# Altium PCB VoiceTouch_PCB_L6.PcbDoc (part 2 of 2)
Units mm, origin at the board's own origin, x right, y up, seen from the top; angles counter-clockwise.
Board outline 39 x 33.1 mm, 6 copper layers (L1, L2 (GND), L3, L4 (PWR), L5 (GND), L6), stack 0.726 mm thick; 65 components, 88 nets, 317 pads, 56 vias.
Unrouted connection lines stored in the file: 149.
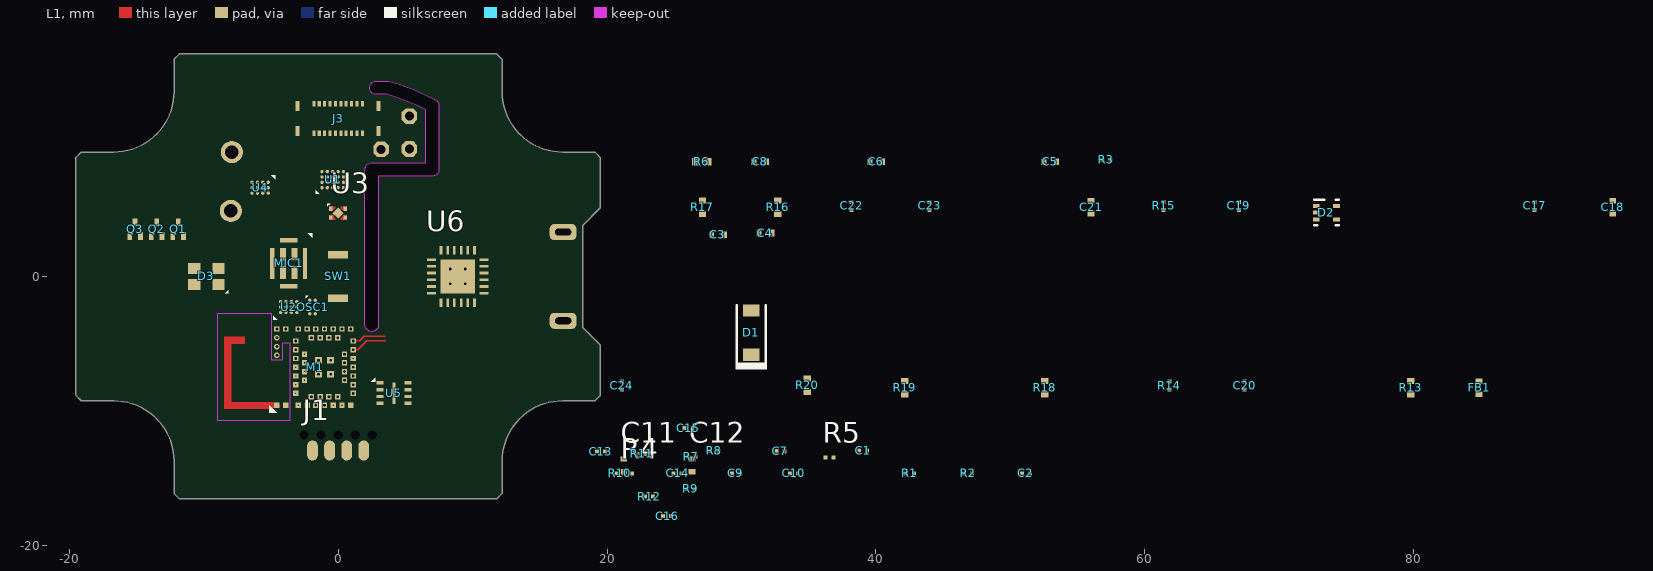
[diagram p0: L1 view]

## Part data (continued)
R6: library part NCP15XH103J03RC, "THERMISTOR NTC 10KOHM 3380K 0402", Case Code (Imperial)=0402, Case Code (Metric)=1005, Current Rating=310uA, Manufacturer=Murata, Max Operating Temperature=125°C, Max Power Dissipation=100mW, Min Operating Temperature=-40°C, Package Quantity=1, Resistance=10kR, Supplier Part Number 1=490-2414-1-ND, Tolerance=5%, Accuracy=0.7%, Case/Package=0402, Category=Thermistors, Category 1="Sensors, Transducers", Category 2="Temperature Sensors - NTC Thermistors", ComponentLink1Description=https://datasheet.ciiva.com/22712/1825737-22712084.pdf?src-supplier=Element14, ComponentLink1URL=https://datasheet.ciiva.com/22712/1825737-22712084.pdf?src-supplier=Element14, ComponentLink2Description=https://datasheet.ciiva.com/11822/0900766b807f1e39-11822074.pdf?src-supplier=RSComponents, ComponentLink2URL=https://datasheet.ciiva.com/11822/0900766b807f1e39-11822074.pdf?src-supplier=RSComponents, ComponentLink3Description=https://datasheet.ciiva.com/29387/506183-da-01-en-thermistor-murata-ncp15xh103j03rc-29387260.pdf?src-supplier=Conrad, ComponentLink3URL=https://datasheet.ciiva.com/29387/506183-da-01-en-thermistor-murata-ncp15xh103j03rc-29387260.pdf?src-supplier=Conrad, ComponentLink4Description=https://datasheet.ciiva.com/2848/r44e-2848211.pdf?src-supplier=Digi-Key, ComponentLink4URL=https://datasheet.ciiva.com/2848/r44e-2848211.pdf?src-supplier=Digi-Key, ComponentLink5Description=https://datasheet.ciiva.com/2848/r44e-2848212.pdf?src-supplier=Digi-Key, ComponentLink5URL=https://datasheet.ciiva.com/2848/r44e-2848212.pdf?src-supplier=Digi-Key, ComponentLink6Description=https://datasheet.ciiva.com/2848/r44e-2848213.pdf?src-supplier=Digi-Key, ComponentLink6URL=https://datasheet.ciiva.com/2848/r44e-2848213.pdf?src-supplier=Digi-Key, ComponentLink7Description=https://datasheet.ciiva.com/3282/l0770e-3282046.pdf?src-supplier=Avnet, ComponentLink7URL=https://datasheet.ciiva.com/3282/l0770e-3282046.pdf?src-supplier=Avnet, Depth=0.5mm, Height=0.5mm, Lead Free="Lead Free", Length=1mm, Manufacturer 1=Murata, Manufacturer Part Number=NCP15XH103J03RC, Manufacturer Part Number 1=NCP15XH103J03RC, Mount="Surface Mount", Number of Pins=2, Packaging="Tape and Reel", Power Rating=100mW, Pricing 1="1=0.12000, 5=0.11600, 10=0.10300, 25=0.09520, 50=0.07600, 100=0.06520, 500=0.05706, 1000=0.04891, 5000=0.04347 (USD)", Radiation Hardening=No, REACH SVHC="No SVHC", RoHS=Yes, Stock 1=295142, Supplier 1=Digi-Key, Termination=SMD/SMT, Width=0.5mm
R13 R16 R17: library part RC0402JR-070RL, "RES SMD 0 OHM JUMPER 1/16W 0402", Case Code (Imperial)=0402, Case Code (Metric)=1005, Manufacturer=Yageo, Max Operating Temperature=155°C, Max Power Dissipation=63mW, Min Operating Temperature=-55°C, Package Quantity=1, Power Rating=62.5mW, Resistance=0mR, Supplier Part Number 1=311-0.0JRCT-ND, Temperature Coefficient=200ppm/°C, Tolerance=5%, Voltage Rating=50V, Case/Package=0402, Category 1=Resistors, Category 2="Chip Resistor - Surface Mount", ComponentLink1Description=https://datasheet.ciiva.com/2452/pyu-rc0402-51-rohs-l-6-2452608.pdf?src-supplier=Digi-Key, ComponentLink1URL=https://datasheet.ciiva.com/2452/pyu-rc0402-51-rohs-l-6-2452608.pdf?src-supplier=Digi-Key, ComponentLink2Description=https://datasheet.ciiva.com/11808/0900766b80c66297-11808195.pdf?src-supplier=RSComponents, ComponentLink2URL=https://datasheet.ciiva.com/11808/0900766b80c66297-11808195.pdf?src-supplier=RSComponents, ComponentLink3Description=https://datasheet.ciiva.com/2452/pyu-r-int-thick-7-2452609.pdf?src-supplier=Digi-Key, ComponentLink3URL=https://datasheet.ciiva.com/2452/pyu-r-int-thick-7-2452609.pdf?src-supplier=Digi-Key, ComponentLink4Description=https://datasheet.ciiva.com/2452/pyu-r-int-thick-7-2452610.pdf?src-supplier=Digi-Key, ComponentLink4URL=https://datasheet.ciiva.com/2452/pyu-r-int-thick-7-2452610.pdf?src-supplier=Digi-Key, ComponentLink5Description=https://datasheet.ciiva.com/8896/pyu-rc0402-51-rohs-l-6-8896201.pdf?src-supplier=Avnet, ComponentLink5URL=https://datasheet.ciiva.com/8896/pyu-rc0402-51-rohs-l-6-8896201.pdf?src-supplier=Avnet, ComponentLink6Description=https://datasheet.ciiva.com/28386/pyu-rc0402-51-rohs-l-6-28386633.pdf?src-supplier=Avnet+Europe, ComponentLink6URL=https://datasheet.ciiva.com/28386/pyu-rc0402-51-rohs-l-6-28386633.pdf?src-supplier=Avnet+Europe, ComponentLink7Description=https://datasheet.ciiva.com/22747/1018594-22747515.pdf?src-supplier=Element14, ComponentLink7URL=https://datasheet.ciiva.com/22747/1018594-22747515.pdf?src-supplier=Element14, ComponentLink8Description=https://datasheet.ciiva.com/15189/getdatasheetpartid-326379-15189533.pdf?src-supplier=Verical, ComponentLink8URL=https://datasheet.ciiva.com/15189/getdatasheetpartid-326379-15189533.pdf?src-supplier=Verical, ComponentLink9Description=https://datasheet.ciiva.com/7983/1018594-7983535.pdf?src-supplier=Element14, ComponentLink9URL=https://datasheet.ciiva.com/7983/1018594-7983535.pdf?src-supplier=Element14, Composition="Thick Film", Contact Plating=Tin,Matte, Depth=0.5mm, Features="Moisture Resistant", Height=0.016inch, Lead Free="Lead Free", Length=1mm, Manufacturer Part Number=RC0402JR-070RL, Military Standard=Not, Mount="Surface Mount", Number of Terminations=2, Packaging="Tape and Reel", Pricing 1="1=0.10000, 10=0.01300, 25=0.00920, 50=0.00700, 100=0.00510, 250=0.00392, 500=0.00312, 1000=0.00230, 5000=0.00165 (USD)", Radiation Hardening=No, REACH SVHC=Unknown, RoHS=Yes, Stock 1=68260221, Supplier 1=Digi-Key, Termination=SMD/SMT, Width=0.02inch
R18: library part RC0402FR-07100RL, "RES SMD 100 OHM 1% 1/16W 0402", Case Code (Imperial)=0402, Case Code (Metric)=1005, Manufacturer=Yageo, Max Operating Temperature=155°C, Min Operating Temperature=-55°C, Power Rating=62.5mW, Supplier Part Number 1=311-100LRCT-ND, Temperature Coefficient=100ppm/°C, Tolerance=1%, Voltage Rating=50V, Case/Package=0402, Category="Chip SMD Resistors", ComponentLink1Description=https://datasheet.ciiva.com/7849/1784430-7849810.pdf?src-supplier=Element14, ComponentLink1URL=https://datasheet.ciiva.com/7849/1784430-7849810.pdf?src-supplier=Element14, ComponentLink2Description=https://datasheet.ciiva.com/11808/0900766b80c66297-11808765.pdf?src-supplier=RSComponents, ComponentLink2URL=https://datasheet.ciiva.com/11808/0900766b80c66297-11808765.pdf?src-supplier=RSComponents, ComponentLink3Description=https://datasheet.ciiva.com/12667/pyu-rc0402-51-rohs-l-6-r-12667957.pdf?src-supplier=Mouser, ComponentLink3URL=https://datasheet.ciiva.com/12667/pyu-rc0402-51-rohs-l-6-r-12667957.pdf?src-supplier=Mouser, ComponentLink4Description=https://datasheet.ciiva.com/16740/pyu-rc0402-51-rohs-l-6-r-16740566.pdf?src-supplier=Future+Electronics, ComponentLink4URL=https://datasheet.ciiva.com/16740/pyu-rc0402-51-rohs-l-6-r-16740566.pdf?src-supplier=Future+Electronics, ComponentLink5Description=https://datasheet.ciiva.com/15189/getdatasheetpartid-329466-15189335.pdf?src-supplier=Verical, ComponentLink5URL=https://datasheet.ciiva.com/15189/getdatasheetpartid-329466-15189335.pdf?src-supplier=Verical, ComponentLink6Description=https://datasheet.ciiva.com/22747/1018594-22747511.pdf?src-supplier=Element14, ComponentLink6URL=https://datasheet.ciiva.com/22747/1018594-22747511.pdf?src-supplier=Element14, ComponentLink7Description=https://datasheet.ciiva.com/28367/1018594-28367226.pdf?src-supplier=Element14, ComponentLink7URL=https://datasheet.ciiva.com/28367/1018594-28367226.pdf?src-supplier=Element14, Composition="Thick Film", Depth=0.5mm, Height=0.32mm, Lead Free="Lead Free", Length=1mm, Manufacturer Part Number=RC0402FR-07100RL, Military Standard=Not, Number of Pins=2, Packaging="Tape and Reel", Pricing 1="1=0.10000, 10=0.01600, 100=0.00640, 1000=0.00289, 2500=0.00251, 5000=0.00207 (USD)", REACH SVHC="No SVHC", Resistance=100R, RoHS=Yes, Stock 1=16896437, Supplier 1=Digi-Key, Termination=SMD/SMT, Voltage Rating (DC)=50V, Width=0.5mm
R19: library part RC0402FR-0733RL, "RES SMD 33 OHM 1% 1/16W 0402", Case Code (Imperial)=0402, Case Code (Metric)=1005, Manufacturer=Yageo, Max Operating Temperature=155°C, Min Operating Temperature=-55°C, Package Quantity=10000, Power Rating=62.5mW, Resistor Type="Thick Film", Supplier Part Number 1=311-33.0LRCT-ND, Temperature Coefficient=100ppm/°C, Tolerance=1%, Voltage Rating=50V, Case/Package=0402, Category="Chip SMD Resistors", ComponentLink1Description=https://datasheet.ciiva.com/11819/0900766b80c66297-11819487.pdf?src-supplier=RSComponents, ComponentLink1URL=https://datasheet.ciiva.com/11819/0900766b80c66297-11819487.pdf?src-supplier=RSComponents, ComponentLink2Description=https://datasheet.ciiva.com/15189/getdatasheetpartid-329253-15189431.pdf?src-supplier=Verical, ComponentLink2URL=https://datasheet.ciiva.com/15189/getdatasheetpartid-329253-15189431.pdf?src-supplier=Verical, ComponentLink3Description=https://datasheet.ciiva.com/24070/pyu-rc0402-51-rohs-l-6-r-8721-24070077.pdf?src-supplier=Mouser, ComponentLink3URL=https://datasheet.ciiva.com/24070/pyu-rc0402-51-rohs-l-6-r-8721-24070077.pdf?src-supplier=Mouser, ComponentLink4Description=https://datasheet.ciiva.com/7849/1018594-7849966.pdf?src-supplier=Element14, ComponentLink4URL=https://datasheet.ciiva.com/7849/1018594-7849966.pdf?src-supplier=Element14, ComponentLink5Description=https://datasheet.ciiva.com/7849/1018594-7849967.pdf?src-supplier=Element14, ComponentLink5URL=https://datasheet.ciiva.com/7849/1018594-7849967.pdf?src-supplier=Element14, ComponentLink6Description=https://datasheet.ciiva.com/17070/pyu-rc0402-51-rohs-l-6-r-17070335.pdf?src-supplier=Future+Electronics, ComponentLink6URL=https://datasheet.ciiva.com/17070/pyu-rc0402-51-rohs-l-6-r-17070335.pdf?src-supplier=Future+Electronics, Depth=0.5mm, Height=0.35mm, Lead Free="Lead Free", Length=1mm, Manufacturer Part Number=RC0402FR-0733RL, Military Standard=Not, Number of Pins=2, Packaging="Tape and Reel", Pricing 1="1=0.10000, 10=0.01400, 100=0.00580, 1000=0.00262, 2500=0.00228, 5000=0.00188 (USD)", REACH SVHC=Unknown, Resistance=33R, RoHS=Yes, Stock 1=1165359, Supplier 1=Digi-Key, Termination=SMD/SMT, Voltage Rating (DC)=50V, Width=0.5mm
R20: library part RC0402JR-0747RL, "RES SMD 47 OHM 5% 1/16W 0402", Case Code (Imperial)=0402, Case Code (Metric)=1005, Manufacturer=Yageo, Max Operating Temperature=155°C, Min Operating Temperature=-55°C, Power Rating=62.5mW, Supplier Part Number 1=311-47JRCT-ND, Temperature Coefficient=100ppm/°C, Tolerance=5%, Voltage Rating=50V, Case/Package=0402, Category="Chip SMD Resistors", Category 1=Resistors, Category 2="Chip Resistor - Surface Mount", ComponentLink1Description=https://datasheet.ciiva.com/12577/pyu-rc0402-51-rohs-l-6-r-12577238.pdf?src-supplier=Mouser, ComponentLink1URL=https://datasheet.ciiva.com/12577/pyu-rc0402-51-rohs-l-6-r-12577238.pdf?src-supplier=Mouser, ComponentLink2Description=https://datasheet.ciiva.com/46394/1018594-46394971.pdf?src-supplier=Element14, ComponentLink2URL=https://datasheet.ciiva.com/46394/1018594-46394971.pdf?src-supplier=Element14, ComponentLink3Description=https://datasheet.ciiva.com/7850/1018594-7850220.pdf?src-supplier=Element14, ComponentLink3URL=https://datasheet.ciiva.com/7850/1018594-7850220.pdf?src-supplier=Element14, ComponentLink4Description=https://datasheet.ciiva.com/7850/1018594-7850221.pdf?src-supplier=Element14, ComponentLink4URL=https://datasheet.ciiva.com/7850/1018594-7850221.pdf?src-supplier=Element14, Composition="Thick Film", Depth=0.5mm, Height=0.35mm, Lead Free="Lead Free", Length=1mm, Manufacturer 1=Yageo, Manufacturer Part Number=RC0402JR-0747RL, Manufacturer Part Number 1=RC0402JR-0747RL, Military Standard=Not, Packaging="Tape and Reel", Pricing 1="1=0.10000, 10=0.01300, 100=0.00530, 1000=0.00236, 2500=0.00205, 5000=0.00169 (USD)", REACH SVHC=Unknown, Resistance=47R, RoHS=Yes, Stock 1=1505913, Supplier 1=Digi-Key, Termination=SMD/SMT, Weight=2.3E-05oz, Width=0.5mm
SW1: "SWITCH TACTILE SPST-NO 0.02A 15V", Manufacturer=E-Switch, Max Operating Temperature=85°C, Min Operating Temperature=-40°C, Operating Force=240gf, Supplier Part Number 1=EG5393CT-ND, Actuator Type=Standard, Category="Tactile Switches", ComponentLink1Description=https://www.e-switch.com/system/asset/product_line/data_sheet/221/TL3780.pdf?src-supplier=Digi-Key, ComponentLink1URL=https://www.e-switch.com/system/asset/product_line/data_sheet/221/TL3780.pdf?src-supplier=Digi-Key, Illumination Type=Non-Illuminated, Manufacturer Part Number=TL3780AF240QG, Mechanical Life=500000Cycles, Mount="Surface Mount", Packaging="Tape and Reel", Pricing 1="1=0.30000, 10=0.28800, 25=0.27280, 100=0.24710, 250=0.22528, 500=0.20940, 1000=0.17863, 2500=0.17367 (USD)", RoHS=Yes, Stock 1=54701, Supplier 1=Digi-Key, Switch Function=Off-Mom, Switch Travel=0.13mm, Termination="Gull Wing", Throw Configuration=SPST
U1: "LOW IQ LINEAR BATTERY CHARGE MAN", Manufacturer="Texas Instruments", Supplier Part Number 1=296-BQ25150YFPRCT-ND, Category="PMIC - Battery Chargers", Manufacturer Part Number=BQ25150YFPR, Pricing 1="1=2.80000, 10=2.51300, 25=2.37600, 100=1.95360, 250=1.75296, 500=1.68960, 1000=1.40448 (USD)", Pricing 2="1=3.22000, 10=2.88900, 25=2.73160, 100=2.24590 (USD)", RoHS=No, Stock 1=1459, Stock 2=340, Supplier 1=Digi-Key, Supplier 2=Digi-Key, Supplier Part Number 2=296-53418-1-ND
U2: "IC NDP 32BIT 112KB SRAM WLBGA", Case/Package=WLBGA, Manufacturer=SYNTIANT, Category="Neural Decision Processor", Manufacturer Part Number=NDP100B0, Mount="Surface Mount"
U3: "IC REG LINEAR 0.9V 300MA 4DFN", Manufacturer=Toshiba, Supplier Part Number 1=TCR3UM09ALFCT-ND, Manufacturer Part Number=TCR3UM09A,LF, Pricing 1="1=0.47000, 10=0.35600, 25=0.32080, 100=0.22150, 250=0.18656, 500=0.15158, 1000=0.11660, 2500=0.10494, 5000=0.09911 (USD)", RoHS=No, Stock 1=32360, Supplier 1=Digi-Key
U4: "LRA/ERM HAPTIC DRIVER WLCSP12", Manufacturer="Dialog Semiconductor", Supplier Part Number 1=1564-DA7280-00V42CT-ND, Manufacturer Part Number=DA7280-00V42, Pricing 1="1=2.36000, 10=2.12000, 25=2.00000, 100=1.70400, 250=1.60000, 500=1.40000, 1000=1.16000 (USD)", RoHS=No, RoHS Compliant=No, Stock 1=3330, Supplier 1=Digi-Key
U5: "IC FLSH 8MBIT SPI/QUAD I/O 8USON", Manufacturer=Macronix, Supplier Part Number 1=1092-1207-1-ND, Category=Memory, ComponentLink1Description=http://ckassoc.com/oldsite/pdf/Macronix_Product_Line_Card_July_2017_General%20_070617.pdf?src-supplier=Digi-Key, ComponentLink1URL=http://ckassoc.com/oldsite/pdf/Macronix_Product_Line_Card_July_2017_General%20_070617.pdf?src-supplier=Digi-Key, ComponentLink2Description=http://www.macronix.com/Lists/Datasheet/Attachments/7461/MX25R8035F,%20Wide%20Range,%208Mb,%20v1.6.pdf?src-supplier=Digi-Key, ComponentLink2URL=http://www.macronix.com/Lists/Datasheet/Attachments/7461/MX25R8035F,%20Wide%20Range,%208Mb,%20v1.6.pdf?src-supplier=Digi-Key, Lead Free="Lead Free", Manufacturer Part Number=MX25R8035FZUIL0, Mount="Surface Mount", Packaging="Tape and Reel", Pricing 1="1=0.62000, 10=0.56600, 25=0.55880, 50=0.55560, 100=0.49670, 250=0.49252, 500=0.48524, 1000=0.46788, 5000=0.42616 (USD)", RoHS=Yes, RoHS Compliant=Yes, Stock 1=42271, Supplier 1=Digi-Key
U6: "IC USB TO UART BRIDGE QFN24", Manufacturer="Silicon Labs", Supplier Part Number 1=634-CP2102NA02QFN24R, Category="Interface ICs", Manufacturer Part Number=CP2102N-A02-GQFN24R, Pricing 1="1=1.87000, 10=1.77000, 25=1.72000, 50=1.67000, 100=1.56000, 250=1.52000, 500=1.43000, 1000=1.41000, 10000=1.41000 (USD)", RoHS=Yes, Stock 1=27850, Supplier 1=Mouser

## Free pads (board coordinates)
  oct 1.168x1.168 hole 0.66 mask+0.04: 1(3.2,9.45) 1(5.3,9.475) 1(5.3,11.925)
  round 1.65 hole 1.016: 2(-7.975,4.875) 2(-7.9,9.25)

## Via types
v1: diameter 0.4, hole 0.2, L1 to L6, tented both sides, 43 vias
v2: diameter 0.25, hole 0.1, L1 to L2 (GND), tented both sides, 13 vias

## Nets (pads, with @x,y where several pads share a name; then routed paths per layer and width w, separated by ;. In a path a pad name is that pad's centre, name@x,y a point inside that pad or via, vN(x,y) a via of type N, cw(c..) or ccw(c..) an arc to the next point about the centre after c; other vN are vias at no path point)
+3V3: C24.2 D3.1
+3V3_EXT: C15.2 R12.2 U5.3 U5.7 U5.8
+PMID: C8.2 C14.2 U1.A2 U1.B2 U1.E4 U4.D1
+VBAT: C4.2 U1.A3 U1.B3
+VBUS_5V: C17.2 C18.2 C19.2 C21.2 D1.1 D2.1 U6.7 U6.8
+VDD_0.9V: C1.2 C12.2 U2.A1 U3.1
+VDD_1.8V: C2.2 C3.2 C9.2 C10.2 C11.2 C13.2 C16.2 FB1.1 M1.9 OSC1.3 OSC2.3 R1.2 R2.2 R9.2 R10.2 R11.2 R13.2 U1.D1 U1.E1 U2.A3 U3.3 U3.4 U4.B3
+VDD_3V3: J1.1
+VDD_CP: C23.2 U6.6
+VDD_LDO_1: C22.2 R15.2 U6.5
+VIN: C6.2 C7.2 U1.A1
+VLS: C5.2 U1.D4
ADCIN: U1.C4
ANTENNA_STRIP: M1.1 | length 0.6
  L1 w0.4: -4.951,-9.59 M1.1
  L1 w0.5: -5.111,-9.59 -4.951,-9.59
DTR: U6.23
GND: C1.1 C2.1 C3.1 C4.1 C5.1 C6.1 C7.1 C8.1 C9.1 C10.1 C11.1 C12.1 C13.1 C14.1 C15.1 C16.1 C17.1 C18.1 C19.1 C20.1 C21.1 C22.1 C23.1 C24.1 D2.4 J1.4 J2.1 M1.4 M1.7 M1.8 M1.10 M1.11 M1.18 M1.32 M1.33 M1.41 M1.42 M1.43 M1.44 M1.46 M1.47 M1.48 M1.49 M1.50 M1.51 M1.52 MIC1.5 MIC1.6 MIC1.7 MIC1.8 OSC1.1 OSC1.4 OSC2.4 Q1.2 Q2.2 Q3.2 R4.1 R5.1 R6.1 SW1.2 U1.A4 U2.A2 U3.2 U3.5 U4.B2 U4.C1 U4.C3 U4.D3 U5.4 U6.2 U6.25
  other v1: -1.984,-8.94 -1.334,-8.94 -1.459,-7.27 -0.559,-7.27 -1.459,-6.23 -0.559,-6.23 -4.551,-5.865 -4.551,-5.215 -4.551,-4.565 -4.551,-3.91 -3.901,-3.91 8.349,-0.55 9.449,-0.55 8.349,0.55 9.449,0.55
  other v2: -2.309,-9.59 -0.359,-9.59 0.291,-9.59 -3.146,-8.7 -3.146,-8.05 -2.496,-7.725 -3.146,-7.4 -2.496,-7.075 -3.146,-6.75 -2.496,-6.425 1.129,-6.1
I2C_SCL: R10.1 U1.E3 U4.A2
I2C_SDA: R11.1 U1.E2 U4.A3
LRA_N: U4.C2
LRA_P: U4.D2
nCE: U1.C2
NDP_CLK: M1.17 R7.1 U2.B3
  other v1: 1.129,-6.75
NDP_INT: U2.B1
NetC20_2: C20.2 FB1.2 MIC1.4
NetD1_2: D1.2 J2.5
NetD3_2: D3.2 R18.1
NetD3_3: D3.3 R19.1
NetD3_4: D3.4 R20.1
NetM1_5: M1.5 M1.6
  other v1: -1.659,-9.59 -1.009,-9.59
NetMIC1_1: MIC1.1 R14.1
NetOSC1_2: OSC1.2 R7.2
NetOSC2_2: OSC2.2 R8.2
NetQ1_1: Q1.1
NetQ1_3: Q1.3 R18.2
NetQ2_1: Q2.1
NetQ2_3: Q2.3 R19.2
NetQ3_1: Q3.1
NetQ3_3: Q3.3 R20.2
NetR3_1: R3.1 U2.D2
NetR4_2: R4.2 U1.C3
NetR5_2: R5.2 R6.2 U1.B4
NetR15_1: R15.1 U6.9
NetR16_1: R16.1 U6.21
NetR17_1: R17.1 U6.20
NetSW1_1: SW1.1 U1.C1
nLP: U1.D3
nLRA_INT: R9.1 U4.A1@-5.2,7
nPMIC_INT: R2.1 U1.D2
P0.02: M1.20 | length 2.5
  L1 w0.1: v1(1.129,-4.8) 1.603,-4.8 1.952,-4.45 3.5,-4.45
P0.03: M1.19 | length 2.7
  L1 w0.1: v1(1.129,-5.45) 1.479,-5.45 1.65,-5.279 1.65,-5.273 2.147,-4.775 3.525,-4.775
P0.04: M1.24
  other v1: 0.479,-5.775
P0.05: M1.23
  other v1: 0.479,-6.425
P0.09/NFC1: M1.21
  other v1: 0.479,-7.725
P0.10/NFC2: M1.22
  other v1: 0.479,-7.075
P0.11: M1.34
  other v1: -0.034,-4.56
P0.14: M1.13
  other v1: -0.034,-8.94
P0.15: M1.14
  other v1: 1.129,-8.7
P0.16: M1.15
  other v1: 1.129,-8.05
P0.19: M1.35
  other v1: -0.684,-4.56
P0.20: M1.45
  other v2: -2.496,-5.775
P0.21/nRESET: J1.8 M1.12 R1.1 U1.B1
  other v1: -0.684,-8.94
P0.22: M1.36
  other v1: -1.334,-4.56
P0.23: M1.37
  other v1: -1.984,-4.56
P0.24: M1.38
  other v1: -3.146,-4.8
P0.25: M1.30
  other v1: -2.309,-3.91
P0.26: M1.31
  other v1: -2.959,-3.91
P0.27: M1.29
  other v1: -1.659,-3.91
P0.28: M1.28
  other v1: -1.009,-3.91
P0.29: M1.27
  other v1: -0.359,-3.91
P0.30: M1.26
  other v1: 0.291,-3.91
P.0.31: M1.25
  other v1: 0.941,-3.91
PDM_CLK_R: R3.2 R8.1 U2.D3
PDM_DAT: U2.D1
SELECT: MIC1.3 R13.1
SPI2_CS: R12.1 U5.1
SPI2_MISO: U5.2
SPI2_MOSI: U5.5
SPI2_SCLK: U5.6
SPI_MISO: U2.C2
SPI_MOSI: U2.C3
SPI_SCLK: U2.B2
SPI_SSB: U2.C1
SWDCLK: J1.7 M1.39
  other v1: -3.146,-5.45
SWDIO: J1.5 M1.40
  other v1: -3.146,-6.1
SWO: J1.6 M1.16
  other v1: 1.129,-7.4
USB_CP_D_N: D2.2 D2.3 J2.4 U6.4
USB_CP_D_P: D2.5 J2.3 U6.3
USB_SHIELD: J2.6 J2.7 J2.8 J2.9 J2.10 J2.11
pads on no net: J1.2 J1.3 J1.MH1 J1.MH2 J1.MH3 J1.MH4 J1.MH5 J2.2 J3.1 J3.2 J3.3 J3.4 J3.5 J3.6 J3.7 J3.8 J3.9 J3.10 J3.11 J3.12 J3.13 J3.14 J3.15 J3.16 J3.17 J3.18 J3.19 J3.20 J3.SH1 J3.SH2 J3.SH3 J3.SH4 M1.2 M1.3 MIC1.2 OSC2.1 R14.2 R16.2 R17.2 U4.A1@-5.2,7 U4.B1 U5.9 U6.1 U6.10 U6.11 U6.12 U6.13 U6.14 U6.15 U6.16 U6.17 U6.18 U6.19 U6.22 U6.24
copper on no net:
  other v2: -2.959,-9.59

## Keep-outs
Keep-Out Layer:
  region: -8.961,-2.75 -4.961,-2.75 -4.961,-6.185 -4.136,-6.185 -4.136,-4.925 -3.585,-4.925 -3.585,-10.75 -8.961,-10.75
  text ".Layer_Name" at 2.5,-32.05 h1.52

## Other copper
L1:
  region net ANTENNA_STRIP: -4.961,-9.339 -4.961,-9.839 -8.461,-9.839 -8.461,-9.339
  region net ANTENNA_STRIP: -8.461,-4.5 -7.961,-4.5 -7.961,-9.75 -8.461,-9.75
  region net ANTENNA_STRIP: -8.461,-4.5 -6.961,-4.5 -6.961,-5 -8.461,-5
  text ".Layer_Name" at 2.5,-32.05 h1.52
L3:
  text ".Layer_Name" at 2.5,-32.05 h1.52
L4 (PWR):
  text ".Layer_Name" at 2.5,-32.05 h1.52
L2 (GND):
  text ".Layer_Name" at 2.5,-32.05 h1.52
L5 (GND):
  text ".Layer_Name" at 2.5,-32.05 h1.52
L6:
  text ".Layer_Name" at 2.5,-32.05 h1.52

## Silkscreen, mask and mechanical layers (free items; w line width, h text height)
Top Overlay:
  text ".Layer_Name" at 2.5,-32.05 h1.52
Bottom Overlay:
  text ".Layer_Name" at 2.5,-32.05 h1.52
Top Paste:
  text ".Layer_Name" at 2.5,-32.05 h1.52
Bottom Paste:
  text ".Layer_Name" at 2.5,-32.05 h1.52
Top Solder:
  text ".Layer_Name" at 2.5,-32.05 h1.52
Bottom Solder:
  text ".Layer_Name" at 2.5,-32.05 h1.52
Drill Guide:
  text ".Layer_Name" at 2.5,-32.05 h1.52
Board Outline:
  lines w0: -3.498,-13.556 3.498,-13.556 ; 3.498,13.556 -3.498,13.556 ccw(c0,0) -9,10.724 -9,4.123 -9,4.123 ; 3.498,13.556 cw(c0,0) 6.5,12.4 6.5,8.45 2.5,8.45 ccw(c2.5,7.95) 2,7.95 2,-6.5 ccw(c2.5,-6.5) 2.5,-7 6.5,-7 6.5,-10.5 -9,-10.5 -9,-4.123 ; -9,-4.123 ccw(c-9.8,0) -9,4.123 ; -9,-4.123 ccw(c-9.8,0) -9,4.123 ; -19.5,-8.85 -19.5,8.85 -19.1,9.25 -16.7,9.25 ccw(c-16.7,13.75) -12.2,13.75 -12.2,16.15 -11.8,16.55 11.8,16.55 12.2,16.15 12.2,13.75 ccw(c16.7,13.75) 16.7,9.25 19.1,9.25 19.5,8.85 19.5,5.103 18.207,3.81 18.207,0 18.207,-3.81 19.5,-5.103 19.5,-8.85 19.1,-9.25 16.7,-9.25 ccw(c16.7,-13.75) 12.2,-13.75 12.2,-16.15 11.8,-16.55 -11.8,-16.55 -12.2,-16.15 -12.2,-13.75 ccw(c-16.7,-13.75) -16.7,-9.25 -19.1,-9.25 -19.5,-8.85
  text ".Layer_Name" at 2.5,-32.05 h1.52
Top Assembly:
  circle w0: c-9.8,0 r4.2
  circle w0: c8,0 r6
  circle w0: c0,0 r14
  lines w0.1: 2,-7 2,8.45 12,8.45 12,-7 2,-7
  lines w1: -9.503,3.7 -9.503,10.952 cw(c0,0) -3.617,14.042 ; -9.49,3.687 cw(c-9.8,0) -9.487,-3.687 -9.487,-11 ; -3.497,14.046 -2.7,14.046 ; 2.5,-5.625 2.5,-6.5 7,-6.5 7,-11 ; 2.5,-3.6 2.5,7.95 7,7.95 7,12.705 ; 2.848,14.034 3.645,14.034 cw(c0,0) 6.997,12.7
  text "Actuator" at -12.4,-0.334 h1.52
  text "1254 Coin Battery" at 2.8,-0.364 h1.52
  text "COMPONENTS MARKED 'DNP' SHOULD NOT BE POPULATED." at -19.5,-23.55 h1.52
  text ".Layer_Name" at 2.5,-32.05 h1.52
Bottom Assembly:
  text "COMPONENTS MARKED 'DNP' SHOULD NOT BE POPULATED." at 111.5,-23.55 h1.52
  text ".Layer_Name" at 2.5,-32.05 h1.52
Top Courtyard:
  text ".Layer_Name" at 2.5,-32.05 h1.52
Bottom Courtyard:
  text ".Layer_Name" at 2.5,-32.05 h1.52
Top 3D Body:
  text ".Layer_Name" at 2.5,-32.05 h1.52
Bottom 3D Body:
  text ".Layer_Name" at 2.5,-32.05 h1.52
Manufacturing Notes:
  text "Files" at -19.75,103.744 h2.54
  text "BOARD INFORMATION" at 79.31,103.716 h2.54
  text "*.GTO - Top Overlay" at -19.75,101.176 h2.54
  text "Minimum Track: 100um" at 79.31,98.657 h2.54
  text "*.GTP - Top Paste" at -19.75,98.636 h2.54
  text "*.GTS - Top Solder" at -19.75,96.096 h2.54
  text "Minimum Gap: 100um" at 79.31,96.096 h2.54
  text "*.GTL - L1" at -19.75,93.556 h2.54
  text "Minimum Through Hole VIA: 0.20mm (drill). Drilling: L1-L6" at 79.31,93.556 h2.54
  text "*.G1  - L2 (GND)" at -19.75,91.016 h2.54
  text "Micro VIA: 0.10mm (laser). Drilling: L1-L2, L5-L6" at 79.31,91.016 h2.54
  text "*.G2  - L3" at -19.75,88.476 h2.54
  text "*.G3  - L4 (PWR)" at -19.75,85.936 h2.54
  text "1. REMOVE ALL NON-FUNCTIONAL INNER LAYER PADS." at 79.31,85.936 h2.54
  text "*.G4  - L5 (GND)" at -19.75,83.396 h2.54
  text "2. THIS BOARD CONTAINS IMPEDANCE CONTROLLED TRACKS, TRACK AND GAP SIZES ARE AS FOLLOWS:" at 79.308,83.396 h2.54
  text "*.GBL - L6" at -19.75,80.856 h2.54
  text "TYPE;" at 84.39,78.344 h2.54
  text "Impedance;" at 97.09,78.344 h2.54
  text "*.GBS - Bottom Solder" at -19.75,78.316 h2.54
  text "Layer (Reference);" at 117.41,78.316 h2.54
  text "Width (um);" at 152.97,78.316 h2.54
  text "Gap (um);" at 175.83,78.316 h2.54
  text "50 ohm;" at 97.09,75.797 h2.54
  text "100;" at 152.97,75.797 h2.54
  text "*.GBP - Bottom Paste" at -19.75,75.776 h2.54
  text "SE;" at 84.39,75.776 h2.54
  text "L1(L2), L6(L5);" at 117.41,75.776 h2.54
  text "50 ohm;" at 97.09,73.257 h2.54
  text "130;" at 152.97,73.257 h2.54
  text "*.GBO - Bottom Overlay" at -19.75,73.236 h2.54
  text "SE;" at 84.39,73.236 h2.54
  text "L3(L4)" at 117.41,73.236 h2.54
  text "*.GM1 - Board Outline" at -19.75,70.696 h2.54
  text "*.GM8 - Manufacturing Notes" at -19.75,68.156 h2.54
  text "3. FINISHED PANEL THICKNESS IS NOT CRITICAL: TO BE APPROXIMATELY 0.8mm" at 79.31,68.156 h2.54
  text "*.GM9 - Mechanical Drawings" at -19.75,65.616 h2.54
  text "*.GD1 - Drill Drawing (L1-L6)" at -19.75,63.076 h2.54
  text "4. SURFACE FINISH: Immersion Gold (ENIG)" at 79.31,63.076 h2.54
  text "*.GG1 - Drill Guide (L1-L6)" at -19.75,60.536 h2.54
  text "*.GD2 - [uVia] Drill Drawing (L1-L2)" at -19.75,58.046 h2.54
  text "5. SOLDER RESIST: APPLY TO BOTH SIDES COLOR - BLUE" at 79.31,57.996 h2.54
  text "*.GG2 - [uVia] Drill Guide (L1-L2)" at -19.75,55.546 h2.54
  text "*.GD3 - [uVia] Drill Drawing (L5-L6)" at -19.75,53.046 h2.54
  text "6. COMPONENT IDENT: COLOR TO BE WHITE" at 79.31,52.916 h2.54
  text "*.GG3 - [uVia] Drill Guide (L5-L6)" at -19.75,50.546 h2.54
  text "7. PANEL BY PCB MANUFACTURER" at 79.31,47.836 h2.54
  text "Layer Stack Table" at -19.5,46.086 h2.54
  text "Refer to 1.2T 6-layer 50 90 100 ohm(ATSRO).xls" at -19.5,43.546 h2.54
  text ".Layer_Name" at 2.5,-32.05 h1.52
Mechanical Drawings:
  text ".Layer_Name" at 2.5,-32.05 h1.52
Gerber Information:
  lines w0.2: -19.5,-33.55 91.5,-33.55 ; -19.5,-29.05 111.5,-29.05 ; 35.5,-38.05 35.5,-24.55 ; 91.5,-38.05 91.5,-24.55 ; -19.5,-38.05 -19.5,-24.55 111.5,-24.55 111.5,-38.05 -19.5,-38.05
  text "ALL ARTWORK VIEWED FROM TOP SIDE" at -17.5,-27.55 h1.52
  text "PRJ TITLE =" at 38,-27.55 h1.52
  text ".Project" at 56.5,-27.55 h1.52
  text "REV =" at 93.5,-27.55 h1.52
  text ".VersionRevision" at 103,-27.55 h1.52
  text "LAYER NAME =" at -17.5,-32.05 h1.52
  text "PRJ # =" at 38,-32.05 h1.52
  text ".ProjectNumber" at 50.5,-32.05 h1.52
  text "DRAWN BY" at 93.5,-32.05 h1.52
  text "JW" at 107.35,-32.05 h1.52
  text "keepin" at 97.05,-36.242 h3
  text "CONTACT =" at -17.5,-36.55 h1.52
  text "kim.jiwon@keepin.co.kr" at -2,-36.55 h1.52
  text "GENERATED =" at 38,-36.55 h1.52
  text ".Print_Date" at 57,-36.55 h1.52
  text ".Print_Time" at 74.5,-36.55 h1.52
Drill Drawing:
  circle w0.254: c-17.757,38.59 r0.701
  lines w0.254: -18.458,31.932 -18.107,31.932 -17.757,31.581 -17.406,31.932 -17.056,31.932 -17.406,32.282 -17.056,32.632 -17.406,32.632 -17.757,32.983 -18.107,32.632 -18.458,32.632 -18.107,32.282 -18.458,31.932 ; -18.458,34.735 -17.757,35.086 -17.056,34.735 -17.406,35.436 -17.056,36.137 -17.757,35.787 -18.458,36.137 -18.107,35.436 -18.458,34.735 ; -18.458,41.044 -18.458,41.394 -18.107,41.745 -18.458,42.095 -18.458,42.446 -18.107,42.446 -17.757,42.095 -17.406,42.446 -17.056,42.446 -17.056,42.095 -17.406,41.745 -17.056,41.394 -17.056,41.044 -17.406,41.044 -17.757,41.394 -18.107,41.044 -18.458,41.044 ; -18.458,44.198 -17.056,44.198 -17.056,45.6 -18.458,45.6 -18.458,44.198 ; -18.458,48.754 -17.056,48.754 -17.757,47.352 -18.458,48.754
  lines w0.381: -19.728,30.635 61.303,30.635 ; -19.728,49.56 61.303,49.56 ; -11.622,27.481 -11.622,52.714 ; -4.948,27.481 -4.948,52.714 ; 9.008,27.481 9.008,52.714 ; 15.293,27.481 15.293,52.714 ; 24.445,27.481 24.445,52.714 ; 39.075,27.481 39.075,52.714 ; 46.574,27.481 46.574,52.714 ; -19.728,27.481 61.303,27.481 61.303,52.714 -19.728,52.714 -19.728,27.481
  text "Symbol" at -17.836,50.506 h1.83
  text "Count" at -10.676,50.506 h1.83
  text "Hole Size" at -4.001,50.506 h1.83
  text "Plated" at 9.954,50.506 h1.83
  text "Hole Type" at 16.24,50.506 h1.83
  text "Drill Layer Pair" at 25.391,50.506 h1.83
  text "Via/Pad" at 40.021,50.506 h1.83
  text "Pad Shape" at 47.52,50.506 h1.83
  text "13" at -10.676,47.352 h1.52
  text "3.94mil (0.100mm)" at -4.001,47.352 h1.52
  text "PTH" at 9.954,47.352 h1.52
  text "Round" at 16.24,47.352 h1.52
  text "[UVIA] L1 - L2 (GND)" at 25.391,47.352 h1.52
  text "Via" at 40.021,47.352 h1.52
  text "Rounded" at 47.52,47.352 h1.52
  text "43" at -10.676,44.198 h1.52
  text "7.87mil (0.200mm)" at -4.001,44.198 h1.52
  text "PTH" at 9.954,44.198 h1.52
  text "Round" at 16.24,44.198 h1.52
  text "L1 - L6" at 25.391,44.198 h1.52
  text "Via" at 40.021,44.198 h1.52
  text "Rounded" at 47.52,44.198 h1.52
  text "2" at -10.676,41.044 h1.52
  text "19.69mil (0.500mm)" at -4.001,41.044 h1.52
  text "PTH" at 9.954,41.044 h1.52
  text "Slot" at 16.24,41.044 h1.52
  text "L1 - L6" at 25.391,41.044 h1.52
  text "Pad" at 40.021,41.044 h1.52
  text "Rounded Rectangle" at 47.52,41.044 h1.52
  text "3" at -10.676,37.889 h1.52
  text "26.00mil (0.660mm)" at -4.001,37.889 h1.52
  text "PTH" at 9.954,37.889 h1.52
  text "Round" at 16.24,37.889 h1.52
  text "L1 - L6" at 25.391,37.889 h1.52
  text "Pad" at 40.021,37.889 h1.52
  text "Octagonal" at 47.52,37.889 h1.52
  text "5" at -10.676,34.735 h1.52
  text "27.56mil (0.700mm)" at -4.001,34.735 h1.52
  text "NPTH" at 9.954,34.735 h1.52
  text "Round" at 16.24,34.735 h1.52
  text "L1 - L6" at 25.391,34.735 h1.52
  text "Pad" at 40.021,34.735 h1.52
  text "Rounded" at 47.52,34.735 h1.52
  text "Drill Table" at -19.75,32.624 h2.54
  text "2" at -10.676,31.581 h1.52
  text "40.00mil (1.016mm)" at -4.001,31.581 h1.52
  text "PTH" at 9.954,31.581 h1.52
  text "Round" at 16.24,31.581 h1.52
  text "L1 - L6" at 25.391,31.581 h1.52
  text "Pad" at 40.021,31.581 h1.52
  text "Rounded" at 47.52,31.581 h1.52
  text "68 Total" at -10.676,28.427 h1.52
  text "Slot definitions :" at -17.836,26.219 h1.52
  text "Routed Path Length" at -7.442,26.219 h1.52
  text "= Calculated from tool start centre position to tool end centre position." at 5.435,26.219 h1.52
  text "Hole Length" at -7.442,24.957 h1.52
  text "= Routed Path Length + Tool Size = Slot length as defined in the PCB layout" at 0.654,24.957 h1.52
  text ".Layer_Name" at 2.5,-32.05 h1.52

## Dimensions
-11.8,16.55 to -11.8,-16.55 on Dimensions
-19.5,8.85 to 19.5,8.85 on Dimensions